# Altium PCB STVC.PcbDoc
Units mil, origin at the board's own origin, x right, y up, seen from the top; angles counter-clockwise.
Board outline 1110 x 1200 mil, 4 copper layers (Top Layer, Layer 1, Layer 2, Bottom Layer), stack 62.447 mil thick; 26 components, 6 nets, 134 pads, 0 vias.
Unrouted connection lines stored in the file: 51.
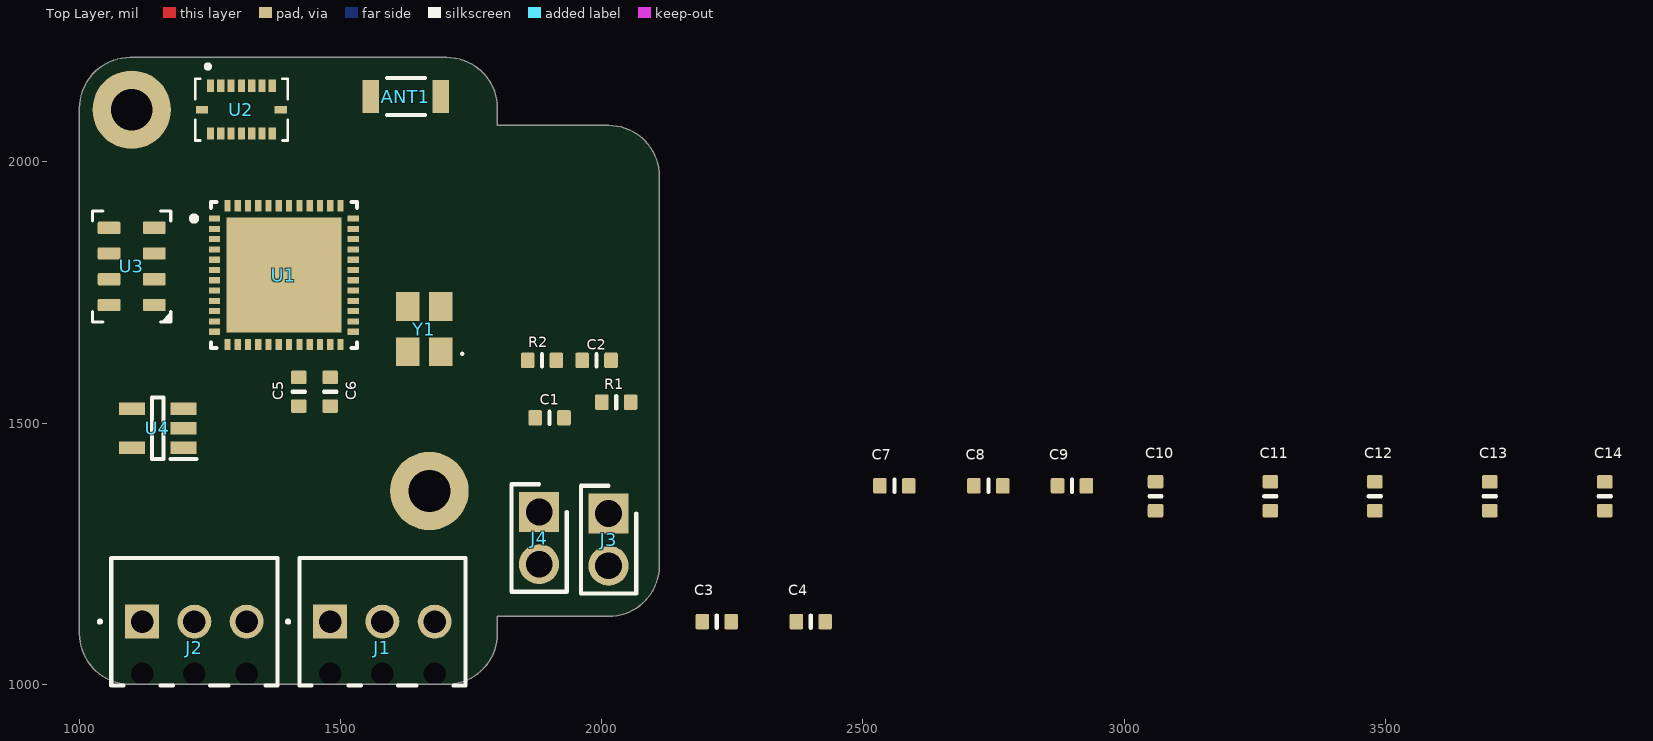
[diagram p0: Top Layer view]
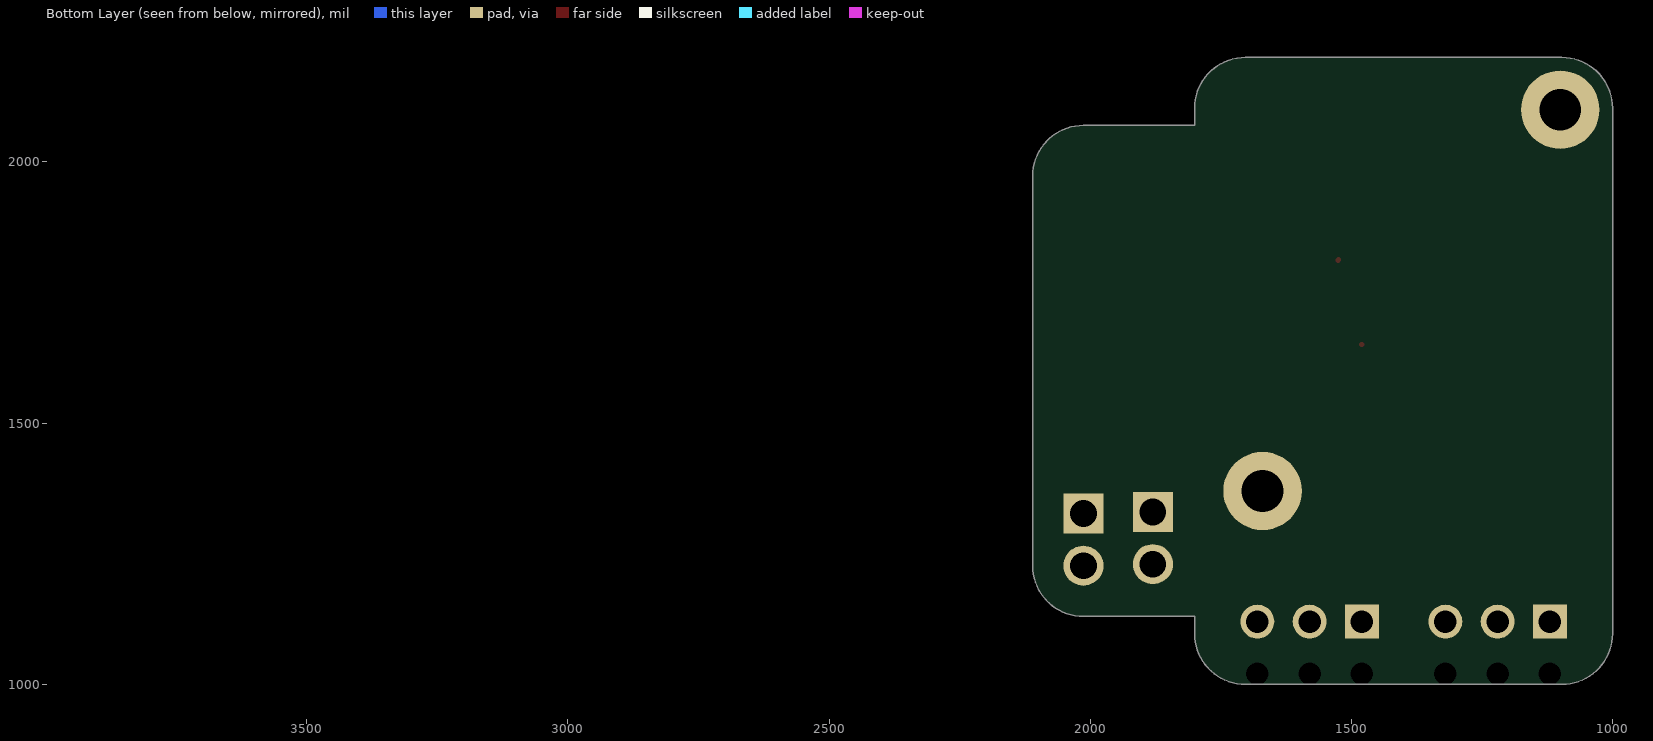
[diagram p1: Bottom Layer view, seen from below]
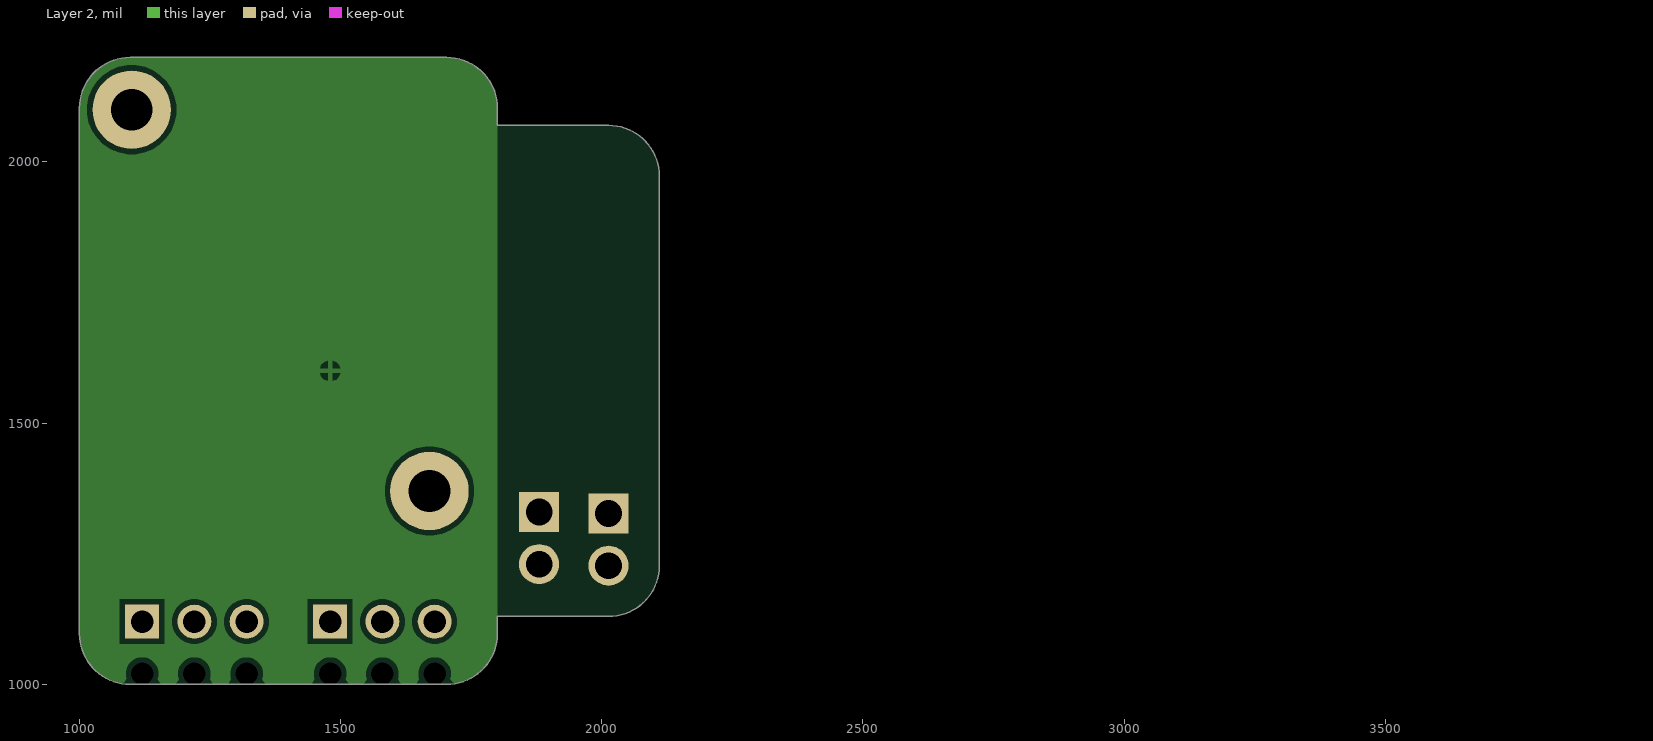
[diagram p2: Layer 2]

## Layer stack, top to bottom
Top Solder: solder mask 0.4, Solder Resist, Dk 3.5
Top Layer: signal copper 1.378
Dielectric 2: prepreg 8.283, PP-006, Dk 4.1
Layer 1: signal copper 0.598
Dielectric 1: dielectric 41.929, FR-4, Dk 4.8
Layer 2: signal copper 0.598
Dielectric 3: prepreg 8.283, PP-006, Dk 4.1
Bottom Layer: signal copper 1.378
Bottom Solder: solder mask 0.4, Solder Resist, Dk 3.5

## Board outline
1000,1097 1000,2103 cw(c1097,2103) 1097,2200 1703,2200 cw(c1703,2103) 1800,2103 1800,2070 2013,2070 cw(c2013,1973) 2110,1973 2110,1227 cw(c2013,1227) 2013,1130 1800,1130 1800,1097 cw(c1703,1097) 1703,1000 1097,1000 cw(c1097,1097)

## Design rules (kind name [scope] priority, off if disabled: settings)
Clearance [All] p1: gap=10 ignorepadtopadclearanceinfootprint=FALSE
PolygonConnect [All] p1: connectstyle=Relief reliefconductorwidth=10 reliefentries=4 polygonreliefangle="90 Angle" airgapwidth=10
RoutingVias [All] p1: holewidth=28 width=50 viastyle="Through Hole" minholewidth=28 minwidth=50 maxholewidth=28 maxwidth=50
SolderMaskExpansion [All] p1: expansion=4 istentingtop=FALSE
SupplyNets "Schematic Supply Nets_1" [InNet('GND')] p1: voltage=0.000
SupplyNets "Schematic Supply Nets" [InNet('VCC')] p2: voltage=0.000
Width [All] p1: maxlimit=10 minlimit=10 preferedwidth=10
30 further rules are at their usual default settings.

## Classes and differential pairs
component class Power: C5 C6 C7 C8 C9 C10 C11 C12 C13 C14 J1 J2 U4
component class Sensors: U2 U3
component class Microcontroller: ANT1 C1 C2 C3 C4 J3 J4 R1 R2 U1 Y1

## Components (designator, comment, footprint, x,y, rotation, side; value= is the part's Value field where it differs from the comment)
ANT1 "AMCA31-2R450G-S1F-T3" FP-AMCA31-MFG 1625,2125 r0 top
C1 "Capacitors,0603,smt,100nF" CAPC0603(1608)100_L 1900,1510 r0 top value=100nF
C2 "Capacitors,0603,smt,100nF" CAPC0603(1608)100_L 1990,1620 r0 top value=100nF
C3 "Capacitors,0603,smt,6pF" CAPC0603(1608)100_L 2220,1120 r0 top value=6pF
C4 "Capacitors,0603,smt,6pF" CAPC0603(1608)100_L 2400,1120 r0 top value=6pF
C5 "Capacitors,0603,smt,100nF" CAPC0603(1608)100_L 1420,1560 r90 top value=100nF
C6 "Capacitors,0603,smt,100nF" CAPC0603(1608)100_L 1480,1560 r90 top value=100nF
C7 "Capacitors,0603,smt,100nF" CAPC0603(1608)100_L 2560,1380 r0 top value=100nF
C8 "Capacitors,0603,smt,100nF" CAPC0603(1608)100_L 2740,1380 r0 top value=100nF
C9 "Capacitors,0603,smt,100nF" CAPC0603(1608)100_L 2900,1380 r0 top value=100nF
C10 "Capacitors,0603,smt,100nF" CAPC0603(1608)100_L 3060,1360 r90 top value=100nF
C11 "Capacitors,0603,smt,100nF" CAPC0603(1608)100_L 3280,1360 r90 top value=100nF
C12 "Capacitors,0603,smt,100nF" CAPC0603(1608)100_L 3480,1360 r90 top value=100nF
C13 "Capacitors,0603,smt,100nF" CAPC0603(1608)100_L 3700,1360 r90 top value=100nF
C14 "Capacitors,0603,smt,1uF" CAPC0603(1608)100_L 3920,1360 r90 top value=1uF
J1 "1725669" 1725669 1480,1120 r0 top
J2 "1725669" 1725669 1120,1120 r0 top
J3 "61300211121" HDRV2W110P0X254_1X2_508X254X854P 2013,1327 r270 top
J4 "61300211121" HDRV2W110P0X254_1X2_508X254X854P 1880,1330 r270 top
R1 "Resistors,0603,smt,10k" RESC0603(1608)_L 2027.56,1540 r0 top value=10k
R2 "Resistors,0603,smt,10k" RESC0603(1608)_L 1885.5,1620 r0 top value=10k
U1 "STM32WB50CGU5" FP-UFQFPN48-A0B9-MFG 1391.53,1783.27 r0 top
U2 "BMI088" PQFN50P450X300X100-16N 1310,2100 r0 top
U3 "MS561101BA03-50" TECO-MS561101BA03_V 1100,1800 r180 top
U4 "NCV8730ASN330T1G" SOT95P275X110-5N 1150,1490 r180 top
Y1 "X1E000021016312" X1E000021016312 1660,1680 r90 top

## Footprints (in the part's own frame and the unit in brackets; to place one, negate y for a bottom-side part, rotate by r counter-clockwise, add the part's x,y. Pads: shape width x height; smd on the part's side, far side on the other; paste and mask are expansions set on the pad)
1725669 [mm]
  rect 1.65x1.65 hole 1.1: 1(0,0)
  round 1.65 hole 1.1: 2(2.54,0) 3(5.08,0)
  round 0.55 hole 1.1 unplated: MH1(0,-2.54) MH2(2.54,-2.54) MH3(5.08,-2.54)
  silkscreen extent -2.1,-3.1 6.58,3.1, body extent -1.5,-3.1 6.58,3.1, height 8.5
CAPC0603(1608)100_L [mm] "Chip Capacitor, Body 1.6x0.8mm, Height 1.0mm, IPC High Density"
  rrect25% 0.66x0.76 smd: 1(-0.7,0) 2(0.7,0)
  silkscreen extent 0,-0.3 0,0.3, body extent -0.8,-0.4 0.8,0.4, height 0.95
FP-AMCA31-MFG [mm]
  rect 0.8x1.6 smd paste+0 mask+0: 1(-1.7,0) 2(1.7,0)
  silkscreen extent -0.92,-0.9 0.92,0.9, body extent -2.2,-1 2.2,1, height 0.25
FP-UFQFPN48-A0B9-MFG [mm]
  rect 0.55x0.3 smd paste+0 mask+0: 1(-3.375,2.75) 2(-3.375,2.25) 3(-3.375,1.75) 4(-3.375,1.25) 5(-3.375,0.75) 6(-3.375,0.25) 7(-3.375,-0.25) 8(-3.375,-0.75) 9(-3.375,-1.25) 10(-3.375,-1.75) 11(-3.375,-2.25) 12(-3.375,-2.75) 25(3.375,-2.75) 26(3.375,-2.25) 27(3.375,-1.75) 28(3.375,-1.25) 29(3.375,-0.75) 30(3.375,-0.25) 31(3.375,0.25) 32(3.375,0.75) 33(3.375,1.25) 34(3.375,1.75) 35(3.375,2.25) 36(3.375,2.75)
  rect 0.3x0.55 smd paste+0 mask+0: 13(-2.75,-3.375) 14(-2.25,-3.375) 15(-1.75,-3.375) 16(-1.25,-3.375) 17(-0.75,-3.375) 18(-0.25,-3.375) 19(0.25,-3.375) 20(0.75,-3.375) 21(1.25,-3.375) 22(1.75,-3.375) 23(2.25,-3.375) 24(2.75,-3.375) 37(2.75,3.375) 38(2.25,3.375) 39(1.75,3.375) 40(1.25,3.375) 41(0.75,3.375) 42(0.25,3.375) 43(-0.25,3.375) 44(-0.75,3.375) 45(-1.25,3.375) 46(-1.75,3.375) 47(-2.25,3.375) 48(-2.75,3.375)
  rect 5.6x5.6 smd paste+0 mask+0: 49(0,0)
  silkscreen extent -4.5,-3.55 3.55,3.55, body extent -3.75,-3.75 3.75,3.75, height 0.25
HDRV2W110P0X254_1X2_508X254X854P [mm]
  rect 1.95x1.95 hole 1.3: 1(0,0)
  round 1.95 hole 1.3: 2(2.54,0)
  silkscreen extent -1.35,-1.35 3.89,1.35, body extent -1.27,-1.27 3.81,1.27, height 8.54
PQFN50P450X300X100-16N [mm]
  rect 0.35x0.59 smd: 1(-1.5,1.165) 2(-1,1.165) 3(-0.5,1.165) 4(0,1.165) 5(0.5,1.165) 6(1,1.165) 7(1.5,1.165) 9(1.5,-1.165) 10(1,-1.165) 11(0.5,-1.165) 12(0,-1.165) 13(-0.5,-1.165) 14(-1,-1.165) 15(-1.5,-1.165)
  rect 0.59x0.35 smd: 8(1.915,0) 16(-1.915,0)
  silkscreen extent -2.25,-1.5 2.25,2.2, body extent -2.25,-1.5 2.25,1.5, height 1
RESC0603(1608)_L [mm] "Chip Resistor, Body 1.6x0.8mm, IPC High Density"
  rrect25% 0.66x0.76 smd: 1(-0.7,0) 2(0.7,0)
  silkscreen extent 0,-0.3 0,0.3, body extent -0.8,-0.4 0.8,0.4, height 0.45
SOT95P275X110-5N [mm]
  rect 1.25x0.6 smd: 1(-1.25,0.95) 2(-1.25,0) 3(-1.25,-0.95) 4(1.25,-0.95) 5(1.25,0.95)
  silkscreen extent -1.88,-1.5 0.28,1.5, body extent -1.38,-1.5 1.38,1.5, height 1.1
TECO-MS561101BA03_V [mm] "SMD, 8-Leads, Body 3x5mm, Pitch 1.25mm"
  rrect20% 1.1x0.6 smd: 1(-1.1,1.875) 2(-1.1,0.625) 3(-1.1,-0.625) 4(-1.1,-1.875) 5(1.1,-1.875) 6(1.1,-0.625) 7(1.1,0.625) 8(1.1,1.875)
  silkscreen extent -1.9,-2.7 1.9,2.7, body extent -1.5,-2.5 1.5,2.5, height 0.73
X1E000021016312 [mm]
  rect 1.4x1.15 smd: 1(-1.1,-0.8) 2(1.1,-0.8) 3(1.1,0.8) 4(-1.1,0.8)
  silkscreen extent -1.25,-1.9 -1.15,-1.8, body extent -1.69,-1.26 1.69,1.26, height 0.7

## Part data
ANT1: library part CMP-27836-000002-1, "RF ANT 2.4GHZ CHIP SOLDER SMD", Manufacturer=Abracon, Max Frequency=2450MHz, Package=AMCA31, Power Rating=3W, Temperature="-40°C to +85°C", Temperature Range High=+85°C, Temperature Range Low=-40°C, Automotive=No, Bandwidth=100MHz, Category=Ant, ComponentLink2Description=Datasheet, ComponentLink2URL=https://abracon.com/chip-antenna/AMCA31-2R450G-S1F-T3.pdf, Device Class L1="Integrated Circuits (ICs)", Device Class L2="RF Semiconductors and Devices", Device Class L3="RF Antennas", Digikey Description="RF ANT 2.4GHZ CHIP SOLDER SMD", Height=1.4mm, Impedance=50Ω, Lead Free=Yes, Manufacturer Part Number=AMCA31-2R450G-S1F-T3, Mouser Description="Antennas 2.45GHz BW 90dB + Gain -1 dBi avg.", Number Of Bands=1, Octopart=https://octopart.com/amca31-2r450g-s1f-t3-abracon-31435383, RoHS=TRUE
C1 C2 C3 C4 C5 C6 C7 C8 C9 C10 C11 C12 C13 C14: library part Capacitors, "Capacitor", Case/Package=0603, Component Type=Capacitors, Mounting Technology=smt
J1 J2: "Connector", Manufacturer_Name="Phoenix Contact", Mouser Part Number=651-1725669, Arrow Part Number=1725669, Arrow Price/Stock=https://www.arrow.com/en/products/1725669/phoenix-contact?utm_currency=USD&region=nac, Datasheet Link=https://www.phoenixcontact.com/online/portal/us?uri=pxc-oc-itemdetail:pid=1725669&library=usen&tab=1, Height=8.65mm, Manufacturer_Part_Number=1725669, Mouser Price/Stock=https://www.mouser.co.uk/ProductDetail/Phoenix-Contact/1725669?qs=A%2FKWGUWTCZjmkTL0Oe91ew%3D%3D
J3 J4: "Connector", Manufacturer_Name="Wurth Elektronik", Mouser Part Number=710-61300211121, Datasheet Link=https://componentsearchengine.com/Datasheets/2/61300211121.pdf, Height=8.54mm, Manufacturer_Part_Number=61300211121, Mouser Price/Stock=https://www.mouser.co.uk/ProductDetail/Wurth-Elektronik/61300211121?qs=t4813l51qx%252B1A5GYDQxPlw%3D%3D
R1 R2: library part Resistors, "Resistor", Case/Package=0603, Component Type=Resistors, Mounting Technology=smt
U1: library part CMP-12105-000070-1.A.2, "ULTRA-LOW-POWER DUAL CORE ARM CO", Ambient Temperature Range High=+85°C, Ambient Temperature Range Low=-10°C, Frequency=64MHz, Manufacturer=STMicroelectronics, Max Junction Temp=+105°C, Max Supply Voltage=3.6V, Min Supply Voltage=2V, Package=UFQFPN48-A0B9, Temperature="-10°C to +105°C", Automotive=No, Category=IC, ComponentLink2Description=Datasheet, ComponentLink2URL=https://www.st.com/resource/en/datasheet/stm32wb50cg.pdf, Core Architecture="ARM Cortex-M4", Data Bus Width=32bits, Device Class L1="Integrated Circuits (ICs)", Device Class L2="Embedded Processors and Controllers", Device Class L3=Microcontrollers, Digikey Description="ULTRA-LOW-POWER DUAL CORE ARM CO", Height=0.65mm, Interface=I2C,SPI,UART,USART,SMBus,Other, Lead Free=Yes, Manufacturer Part Number=STM32WB50CGU5, Memory Size=1MBytes, Memory Type=FLASH, Number Of A/D Converters=1, Number Of Adc Channels=10, Number Of Cores=2, Number Of I2C Channels=1, Number Of I/Os=30, Number Of Spi Channels=1, Number Of Timers/Counters=7, Number Of Uart Channels=1, Octopart=https://octopart.com/stm32wb50cgu5-stmicroelectronics-106131324, Ram Size=128KBytes, RoHS=TRUE, Standoff Height=0mm, Temperature Range High=+105°C, Temperature Range Low=-10°C
U2: library part CMP-048-000001-2, "High-performance 6-axis inertial sensor (accelerometer + gyroscope) <a href=\"https://pricing.snapeda.com/parts/BMI088/Bosch%20Sensortec/view-part?ref=eda\">Check prices</a>", Package=None, Availability=Unavailable, Component Type=Standard, Design Item ID=BMI088, MP=BMI088, Pin Count=16, Price=None, Source=BMI088.SchLib
U3: library part CMP-010-00021-3, "Barometric Pressure Sensor, 1.8 to 3.6 V, -40 to 85 degC, 8-Pin SMD, RoHS, Tape and Reel", Case/Package=LGA-8, Max Operating Temperature=85°C, Max Supply Voltage=3.6V, Min Operating Temperature=-40°C, Min Supply Voltage=1.8V, Mounting Technology=SMT, Pins=8, RoHS Compliant=Yes, Sensor Type=Barometer
U4: "Integrated Circuit", Manufacturer_Name=onsemi, Mouser Part Number=863-NCV8730ASN330T1G, Arrow Part Number=NCV8730ASN330T1G, Arrow Price/Stock=https://www.arrow.com/en/products/ncv8730asn330t1g/on-semiconductor?region=nac, Datasheet Link=https://www.onsemi.com/pub/Collateral/NCV8730-D.PDF, Height=1.1mm, Manufacturer_Part_Number=NCV8730ASN330T1G, Mouser Price/Stock=https://www.mouser.co.uk/ProductDetail/onsemi/NCV8730ASN330T1G?qs=GedFDFLaBXG9IOwczGXdzg%3D%3D
Y1: "Crystal or Oscillator", Manufacturer_Name="Epson Timing", Height=0.6mm, Manufacturer_Part_Number=X1E000021016312

## Free pads (board coordinates)
  round 150 hole 80: 20(1100,2100) 20(1670,1370)

## Nets (pads, with @x,y where several pads share a name; then routed paths per layer and width w, separated by ;. In a path a pad name is that pad's centre, name@x,y a point inside that pad or via, vN(x,y) a via of type N, cw(c..) or ccw(c..) an arc to the next point about the centre after c; other vN are vias at no path point)
BOOT0: C2.2 J4.1 R2.1 U1.4
GND: C1.1 C2.1 C3.1 C4.1 C5.1 C6.1 C7.1 C8.1 C9.1 C10.1 C11.1 C12.1 C13.1 C14.1 J3.2 J4.2 U1.22 U1.32 U1.49 Y1.2 Y1.4 | length 1.7
  Top Layer w10: U1.32 U1.32@1525.62,1811.57
NRST: C1.2 J3.1 R1.1 U1.7
VCC: C5.2 C6.2 C7.2 C8.2 C9.2 C10.2 C11.2 C12.2 C13.2 C14.2 R1.2 R2.2 U1.8 U1.20 U1.23 U1.31 U1.33 U1.34 U1.35 U1.40 U1.48 U4.5 | length 0.1
  Top Layer w10: U1.23@1480,1650.39 U1.23
XIN: C3.2 U1.25 Y1.1
XOUT: C4.2 U1.24 Y1.3
pads on no net: ANT1.1 ANT1.2 J1.1 J1.2 J1.3 J1.MH1 J1.MH2 J1.MH3 J2.1 J2.2 J2.3 J2.MH1 J2.MH2 J2.MH3 U1.1 U1.2 U1.3 U1.5 U1.6 U1.9 U1.10 U1.11 U1.12 U1.13 U1.14 U1.15 U1.16 U1.17 U1.18 U1.19 U1.21 U1.26 U1.27 U1.28 U1.29 U1.30 U1.36 U1.37 U1.38 U1.39 U1.41 U1.42 U1.43 U1.44 U1.45 U1.46 U1.47 U2.1 U2.2 U2.3 U2.4 U2.5 U2.6 U2.7 U2.8 U2.9 U2.10 U2.11 U2.12 U2.13 U2.14 U2.15 U2.16 U3.1 U3.2 U3.3 U3.4 U3.5 U3.6 U3.7 U3.8 U4.1 U4.2 U4.3 U4.4
copper on no net: | length 0.2
  Top Layer w10: 1480,1650.29 cw(c1480.11,1650.29) 1480.11,1650.39

## Polygon pours and split planes (outlines as drawn)
VCC on Layer 2 "VCC_L03_P000" (solid, pour order 0): 1000,2100 cw(c1100,2100) 1100,2200 1700,2200 cw(c1700,2100) 1800,2100 1800,1100 cw(c1700,1100) 1700,1000 1100,1000 cw(c1100,1100) 1000,1100

## Silkscreen, mask and mechanical layers (free items; w line width, h text height)
Mechanical 1:
  lines w0: 1000,1000 1000,1803
  lines w10: 1000,1097 ccw(c1097,1097) 1097,1000 1703,1000 ccw(c1703,1097) 1800,1097 1800,1130 2013,1130 ccw(c2013,1227) 2110,1227 2110,1973 ccw(c2013,1973) 2013,2070 1800,2070 1800,2103 ccw(c1703,2103) 1703,2200 1701.5,2200 1298.5,2200 1097,2200 ccw(c1097,2103) 1000,2103 1000,1200 1000,1097